# Altium PCB M1-Test-Board.PcbDoc (part 3 of 5)
Units mil, origin at the board's own origin, x right, y up, seen from the top; angles counter-clockwise.
Board outline 3977 x 5000 mil, 4 copper layers (Top, GND Layer 2, Power Layer 3, Bottom), stack 60 mil thick; 191 components, 124 nets, 579 pads, 189 vias.
Unrouted connection lines stored in the file: 80.
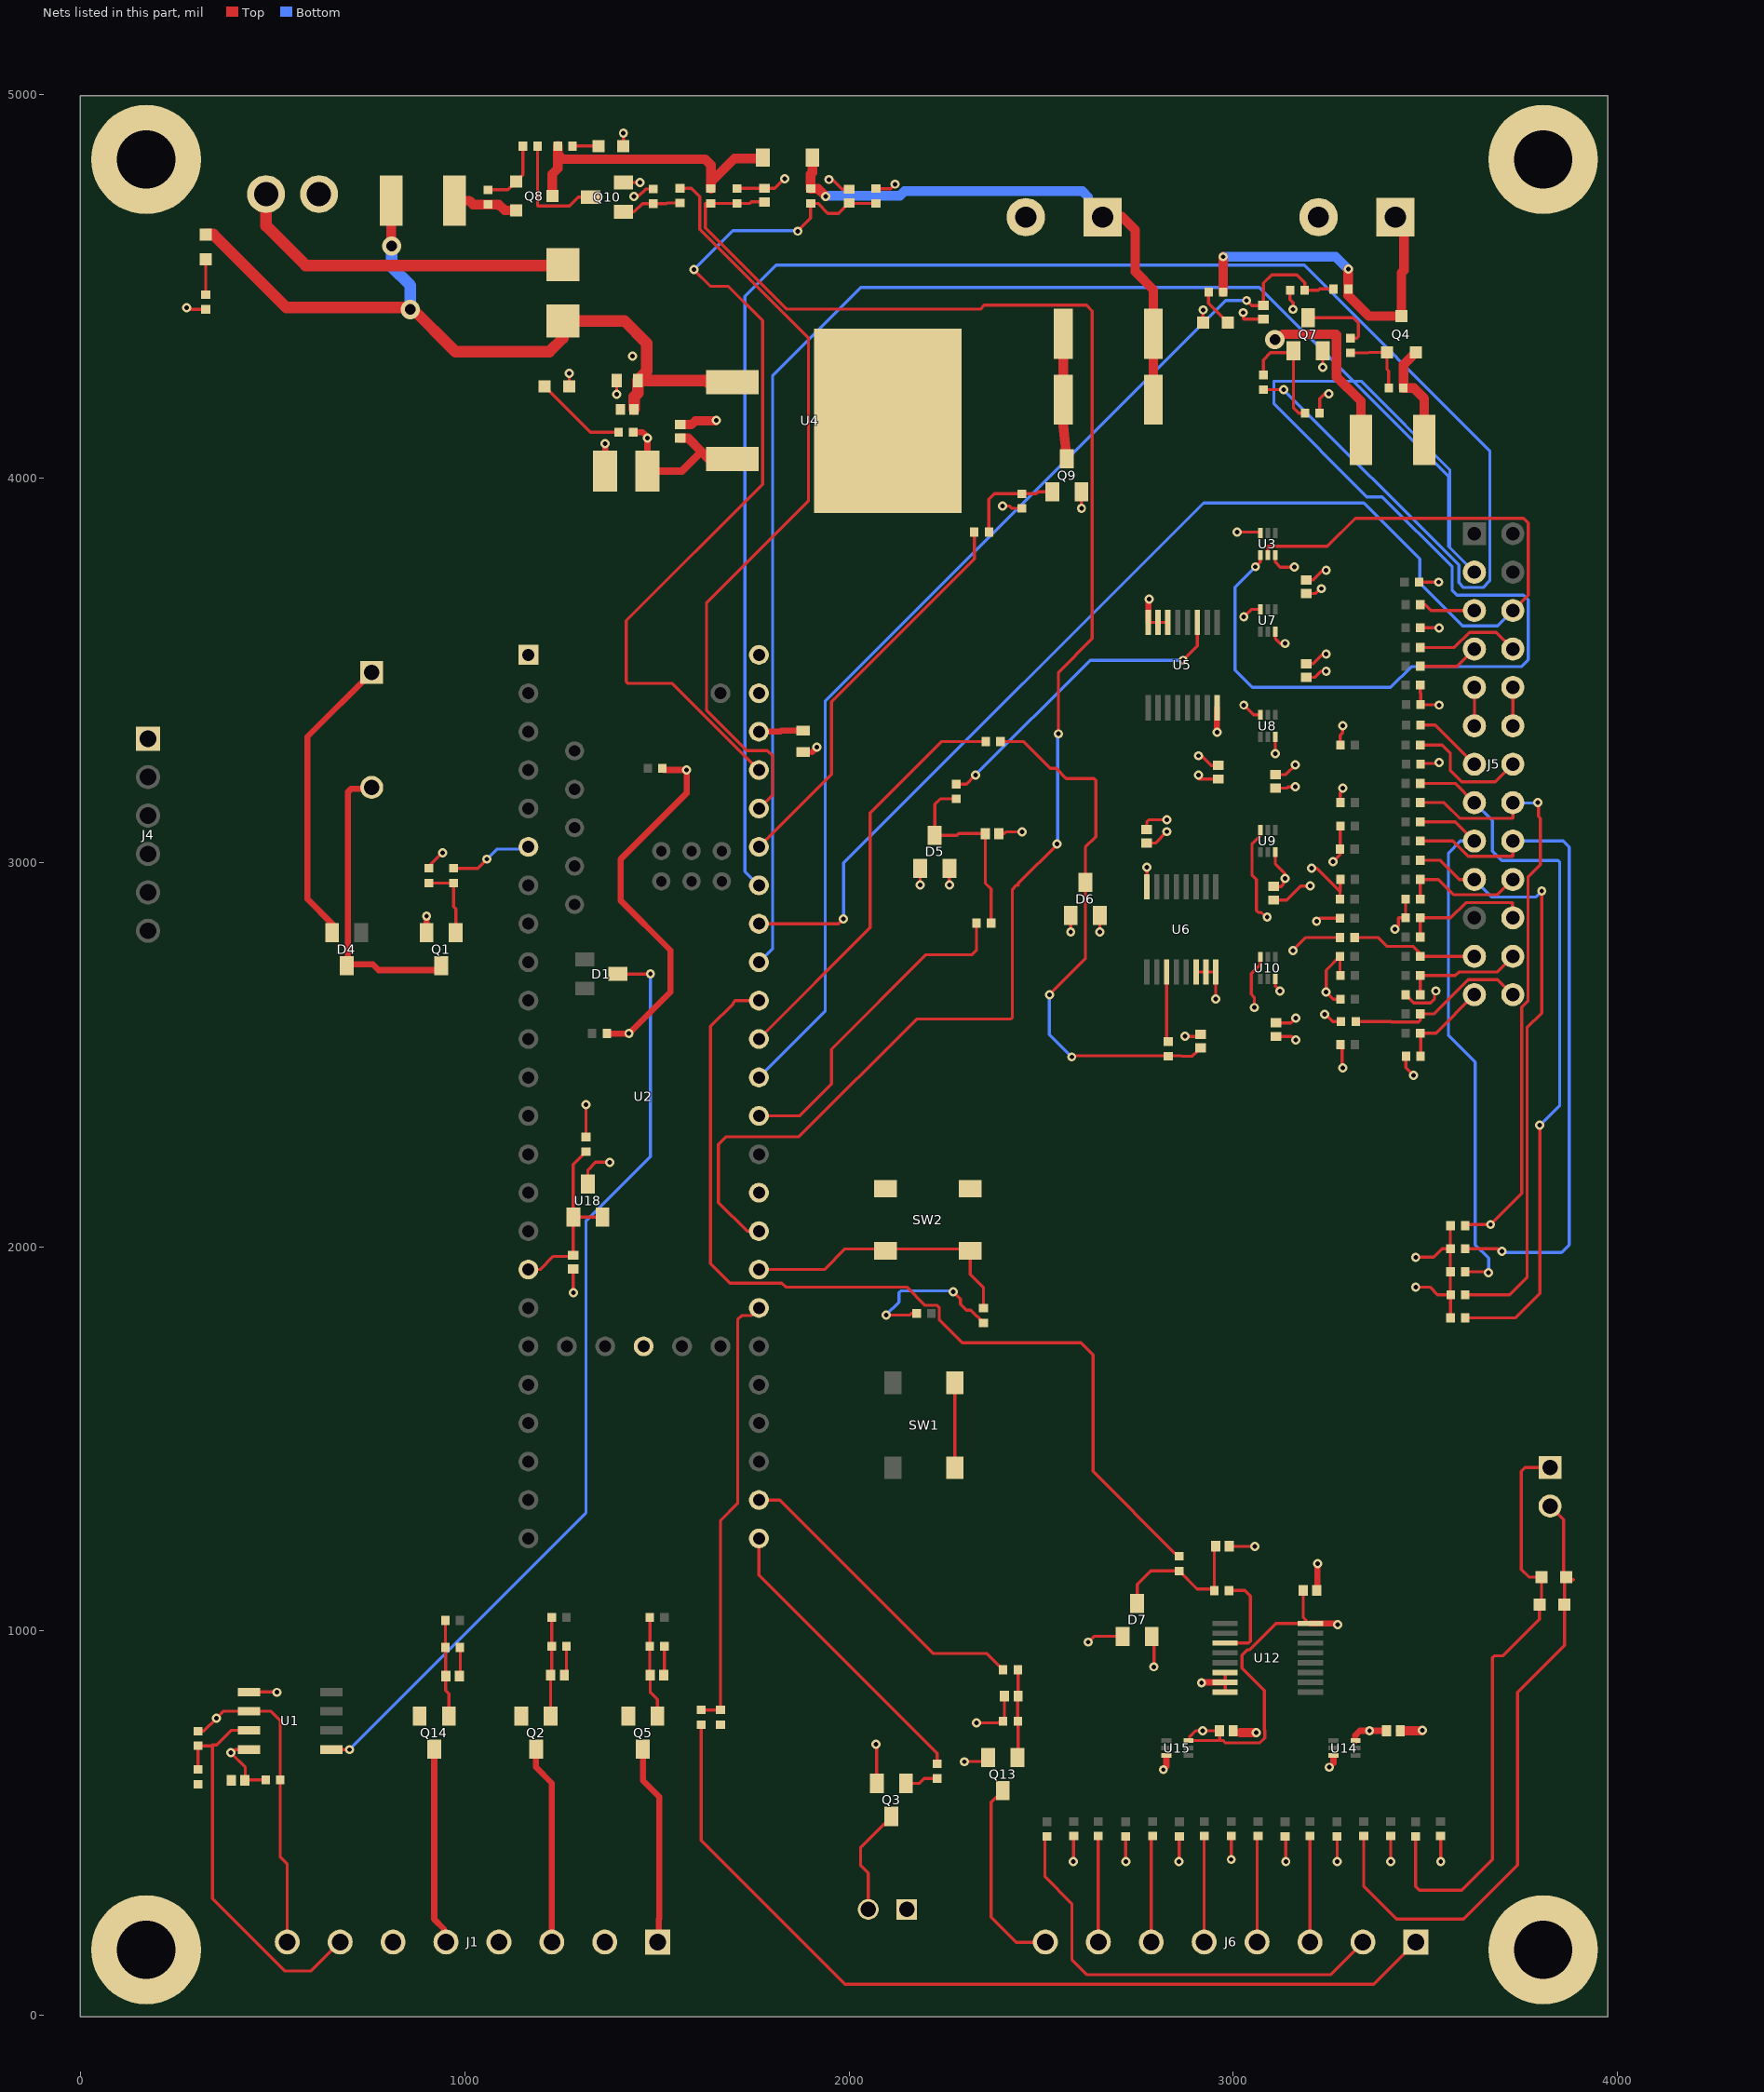
[diagram p4: the nets of this part, all layers, seen from the top]

## Part data (continued)
R2 R3 R8 R22 R23 R24 R25 R26 R27 R28 R29 R30 R31 R32 R33 R34 R35 R36 R37 R38 R39 R40 R41 R42 R43 R44 R45 R46 R47 R48 R49 R52 R60 R61 R62 R63 R64 R65 R66 R67 R70 R73 R88 R90 R92 R94 R99 R100 R102 R103 R104 R108 R117 R118 R119 R120 R121: library part Res-00002, "Thick Film 0402 10K OHM 1% 1/16W 0402", Case Code (Imperial)=0402, Case Code (Metric)=1005, LCSC Part Number=C25744, Manufacturer=Yageo, Manufacturer Part Number=RC0402FR-0710KP, Max Operating Temperature=155°C, Max Power Dissipation=63mW, Min Operating Temperature=-55°C, Power Rating=62.5mW, Resistance=10k, Resistor Type="Thick Film", Supplier Part Number 1=YAG1249CT-ND, Temperature Coefficient=150ppm/°C, Tolerance=1%, Case/Package=0402, Category="Chip SMD Resistors", ComponentLink1Description=http://www.yageo.com/NewPortal/yageodocoutput, ComponentLink1URL=http://www.yageo.com/NewPortal/yageodocoutput, Features="Moisture Resistant", Height=0.016inch, Length=0.039inch, Mount="Surface Mount", Number of Terminations=2, Packaging="Tape and Reel", Part Name=Res-00002, Pricing 1="1=0.10000, 10=0.03600, 100=0.01450, 1000=0.00", RoHS=Yes, RoHS Compliant=Yes, Stock 1=161500, Supplier 1=Digi-Key, Width=0.02inch
R4 R5 R82: library part Res-00009, "Thick Film 0402 330 Ohm 1% 1/16W ±100ppm/°C Molded SMD Paper T/R", Case Code (Imperial)=0402, Case Code (Metric)=1005, LCSC Part Number=C12246, Manufacturer=Yageo, Manufacturer Part Number=AF0402FR-07330RL, Max Operating Temperature=155°C, Max Power Dissipation=63mW, Min Operating Temperature=-55°C, Power Rating=62.5mW, Resistance=330R, Resistor Type="Thick Film", Supplier Part Number 1=13-AF0402FR-07330RLCT-ND, Temperature Coefficient=100ppm/°C, Tolerance=1%, Case/Package=0402, Category="Chip SMD Resistors", ComponentLink1Description=http://www.yageo.com/documents/recent/PYu-AF_, ComponentLink1URL=http://www.yageo.com/documents/recent/PYu-AF_, Features="Moisture Resistant,Anti-Sulfur", Height=0.015inch, Length=0.039inch, Mount="Surface Mount", Number of Terminations=2, Packaging="Tape and Reel", Part Name=Res-00009, Pricing 1="1=0.10000, 10=0.05800, 100=0.02360, 1000=0.01", Radiation Hardening=No, RoHS=Yes, RoHS Compliant=Yes, Stock 1=15948, Supplier 1=Digi-Key, Width=0.02inch
R6 R89 R101 R113: library part Res-00004, "Thick Film 0402 5.1K Ohm 1% 1/16W 0402", Case Code (Imperial)=0402, Case Code (Metric)=1005, LCSC Part Number=C25905, Manufacturer="Stackpole Electronics", Manufacturer Part Number=RMCF0402FT5K10, Max Operating Temperature=155°C, Max Power Dissipation=63mW, Min Operating Temperature=-55°C, Power Rating=62.5mW, Resistance=5.1k, Resistor Type="Thick Film", Supplier Part Number 1=RMCF0402FT5K10CT-ND, Temperature Coefficient=100ppm/°C, Tolerance=1%, Case/Package=0402, Category="Chip SMD Resistors", ComponentLink1Description=http://components.arrow.com/part/dataview/513, ComponentLink1URL=http://components.arrow.com/part/dataview/513, ComponentLink2Description=https://www.seielect.com/catalog/SEI-RMCF_RMC, ComponentLink2URL=https://www.seielect.com/catalog/SEI-RMCF_RMC, ComponentLink3Description=https://www.seielect.com/catalog/SEI-Packagin, ComponentLink3URL=https://www.seielect.com/catalog/SEI-Packagin, ComponentLink4Description=https://datasheet.ciiva.com/15193/getdatashee, ComponentLink4URL=https://datasheet.ciiva.com/15193/getdatashee, Construction=Rectangular, Contact Plating=Tin,Matte, Depth=0.5mm, Features="Automotive AEC-Q200", Height=0.016inch, Lead Free="Lead Free", Length=0.039inch, Military Standard=Not, Mount="Surface Mount", Number of Terminations=2, Packaging="Tape and Reel", Part Name=Res-00004, Pricing 1="1=0.10000, 10=0.01500, 100=0.00610, 1000=0.00", Radiation Hardening=No, RoHS=Yes, RoHS Compliant=Yes, Series=RMCF, Size Code=0402, Stock 1=131490, Supplier 1=Digi-Key, Width=0.02inch
R7 R85: library part Res-00001, "Thick Film 0402 1K Ohm 1% 1/8W 0402", Case Code (Imperial)=0402, Case Code (Metric)=1005, LCSC Part Number=C21190, Manufacturer="TE Connectivity", Manufacturer Part Number=CRGP0402F1K0, Max Operating Temperature=155°C, Max Power Dissipation=125mW, Min Operating Temperature=-55°C, Power Rating=0.125W, Resistance=1k, Resistor Type="Thick Film", Supplier Part Number 1=A130355CT-ND, Temperature Coefficient=100ppm/°C, Tolerance=1%, Case/Package=0402, Category="Chip SMD Resistors", ComponentLink1Description=https://www.te.com/commerce/DocumentDelivery/, ComponentLink1URL=https://www.te.com/commerce/DocumentDelivery/, ComponentLink4Description=none, Mount="Surface Mount", Number of Terminations=2, Packaging="Tape and Reel", Part Name=Res-00001, Pricing 1="1=0.12000, 10=0.11100, 100=0.04270, 1000=0.01", RoHS=Yes, RoHS Compliant=Yes, Stock 1=16450, Supplier 1=Digi-Key
R9 R10 R96 R105 R109 R116 R124 R125: library part Res-00003, "Thick Film 0402 100K OHM 1% 1/16W 0402", Case Code (Imperial)=0402, Case Code (Metric)=1005, LCSC Part Number=C25741, Manufacturer="Stackpole Electronics", Manufacturer Part Number=RMCF0402FT100K, Power Rating=62.5mW, Supplier Part Number 1=RMCF0402FT100KCT-ND, Case/Package=0402, Category="Chip SMD Resistors", Contact Plating=Tin,Matte, Mount="Surface Mount", Part Name=Res-00003, Pricing 1="1=0.10000, 10=0.01500, 100=0.00610, 1000=0.00", RoHS=Yes, Stock 1=13703190, Supplier 1=Digi-Key
R11 R12 R13 R14 R15 R16 R50 R51 R53 R54 R55 R56 R57 R68 R69 R71 R72: library part Res-00011, "Res Thick Film 0402 51K Ohm 1% 0.063W(1/16W) ±100ppm/C Pad SMD Automotive T/R", Case Code (Imperial)=0402, Case Code (Metric)=1005, LCSC Part Number=C25794, Manufacturer="Stackpole Electronics", Manufacturer Part Number=RMCF0402FT51K0, Max Operating Temperature=155°C, Max Power Dissipation=63mW, Min Operating Temperature=-55°C, Resistance=51kR, Resistor Type="Thick Film", Supplier Part Number 1=RMCF0402FT51K0CT-ND, Temperature Coefficient=100ppm/°C, Tolerance=1%, Case/Package=0402, Category="Chip SMD Resistors", ComponentLink1Description=http://components.arrow.com/part/dataview/535, ComponentLink1URL=http://components.arrow.com/part/dataview/535, ComponentLink2Description=https://www.seielect.com/catalog/SEI-RMCF_RMC, ComponentLink2URL=https://www.seielect.com/catalog/SEI-RMCF_RMC, ComponentLink3Description=https://www.seielect.com/Catalog/SEI-RMCF_RMC, ComponentLink3URL=https://www.seielect.com/Catalog/SEI-RMCF_RMC, ComponentLink4Description=https://www.seielect.com/catalog/SEI-Packagin, ComponentLink4URL=https://www.seielect.com/catalog/SEI-Packagin, Contact Plating=Tin,Matte, Features="Automotive AEC-Q200", Height=0.016inch, Length=0.039inch, Mount="Surface Mount", Number of Terminations=2, Packaging="Tape and Reel", Part Name=Res-00011, Power Rating=63mW, Pricing 1="1=0.10000, 10=0.01500, 100=0.00610, 1000=0.00", Radiation Hardening=No, RoHS=Yes, RoHS Compliant=Yes, Series=RMCF, Stock 1=588931, Supplier 1=Digi-Key, Width=0.02inch
R17 R21 R58 R59 R93 R106 R107 R111 R112 R114: library part Res-00008, "Thick Film 0402 2.8K Ohm 1% 0.063W ±100ppm/°C Molded SMD Paper T/R", Case Code (Imperial)=0402, Case Code (Metric)=1005, LCSC Part Number=C62741, Manufacturer="Stackpole Electronics", Manufacturer Part Number=RMCF0402FT2K80, Max Operating Temperature=155°C, Max Power Dissipation=63mW, Min Operating Temperature=-55°C, Power Rating=62.5mW, Resistance=2.8kR, Resistor Type="Thick Film", Supplier Part Number 1=RMCF0402FT2K80CT-ND, Temperature Coefficient=100ppm/°C, Tolerance=1%, Case/Package=0402, Category="Chip SMD Resistors", ComponentLink1Description=https://www.seielect.com/catalog/SEI-RMCF_RMC, ComponentLink1URL=https://www.seielect.com/catalog/SEI-RMCF_RMC, ComponentLink2Description=https://www.seielect.com/Catalog/SEI-RMCF_RMC, ComponentLink2URL=https://www.seielect.com/Catalog/SEI-RMCF_RMC, ComponentLink3Description=https://www.seielect.com/catalog/SEI-Packagin, ComponentLink3URL=https://www.seielect.com/catalog/SEI-Packagin, Contact Plating=Tin,Matte, Features="Automotive AEC-Q200", Height=0.016inch, Lead Free="Lead Free", Length=0.039inch, Mount="Surface Mount", Number of Terminations=2, Packaging="Tape and Reel", Part Name=Res-00008, Pricing 1="1=0.10000, 10=0.01500, 100=0.00610, 1000=0.00", Radiation Hardening=No, RoHS=Yes, RoHS Compliant=Yes, Series=RMCF, Stock 1=141882, Supplier 1=Digi-Key, Width=0.02inch
R18 R19 R20: library part Res-00012, "Res Thick Film 0402 8.2K Ohm 5% 0.063W ±100ppm/°C Molded SMD Paper T/R", Case Code (Imperial)=0402, Case Code (Metric)=1005, LCSC Part Number=C25924, Manufacturer="Stackpole Electronics", Manufacturer Part Number=RMCF0402JT8K20, Max Operating Temperature=155°C, Max Power Dissipation=63mW, Min Operating Temperature=-55°C, Resistance=8.2kR, Resistor Type="Thick Film", Supplier Part Number 1=738-RMCF0402JT8K20CT-ND, Temperature Coefficient=100ppm/°C, Tolerance=5%, Case/Package=0402, Category="Chip SMD Resistors", ComponentLink1Description=https://www.seielect.com/Catalog/SEI-RMCF_RMC, ComponentLink1URL=https://www.seielect.com/Catalog/SEI-RMCF_RMC, ComponentLink2Description=https://www.seielect.com/catalog/sei-rmcf_rmc, ComponentLink2URL=https://www.seielect.com/catalog/sei-rmcf_rmc, ComponentLink3Description=https://www.seielect.com/catalog/SEI-RMCF_RMC, ComponentLink3URL=https://www.seielect.com/catalog/SEI-RMCF_RMC, ComponentLink4Description=http://www.seielect.com/Catalog/Sei-RMC.pdf?s, ComponentLink4URL=http://www.seielect.com/Catalog/Sei-RMC.pdf?s, Contact Plating=Tin,Matte, Features="Automotive AEC-Q200", Height=0.016inch, Lead Free="Lead Free", Length=0.039inch, Mount="Surface Mount", Number of Terminations=2, Packaging="Tape and Reel", Part Name=Res-00012, Power Rating=63mW, Pricing 1="1=0.10000, 10=0.01200, 100=0.00470, 1000=0.00", Radiation Hardening=No, RoHS=Yes, RoHS Compliant=Yes, Series=RMCF, Size Code=0402, Stock 1=9938, Supplier 1=Digi-Key, Width=0.02inch
R97 R98: library part Res-00005, "Thick Film  220 OHM 5% 1W 2512", Case Code (Imperial)=2512, Case Code (Metric)=6432, LCSC Part Number=C38808, Manufacturer="Stackpole Electronics", Manufacturer Part Number=RMCF2512JT220R, Max Operating Temperature=155°C, Max Power Dissipation=1W, Min Operating Temperature=-55°C, Resistance=220R, Resistor Type="Thick Film", Supplier Part Number 1=RMCF2512JT220RCT-ND, Temperature Coefficient=200ppm/°C, Tolerance=5%, Case/Package=2512, Category="Chip SMD Resistors", ComponentLink1Description=https://datasheet.ciiva.com/15193/getdatashee, ComponentLink1URL=https://datasheet.ciiva.com/15193/getdatashee, Construction=Rectangular, Contact Plating=Tin,Matte, Depth=3.2mm, Features="Automotive AEC-Q200", Height=0.028inch, Lead Free="Lead Free", Length=0.248inch, Military Standard=Not, Mount="Surface Mount", Number of Terminations=2, Packaging="Tape and Reel", Part Name=Res-00005, Power Rating=1W, Pricing 1="1=0.30000, 10=0.25300, 100=0.09890, 1000=0.04", Radiation Hardening=No, RoHS=Yes, RoHS Compliant=Yes, Series=RMCF, Size Code=2512, Stock 1=85, Supplier 1=Digi-Key, Width=0.126inch
R110: library part Res-00010, "Thick Film 0402 680 Ohm 1% 0.063W(1/16W) ±100ppm/C Pad SMD Automotive T/R", Case Code (Imperial)=0402, Case Code (Metric)=1005, LCSC Part Number=C25130, Manufacturer="Stackpole Electronics", Manufacturer Part Number=RMCF0402FT680R, Max Operating Temperature=155°C, Max Power Dissipation=63mW, Min Operating Temperature=-55°C, Package Quantity=10000, Power Rating=62.5mW, Resistance=680R, Resistor Type="Thick Film", Supplier Part Number 1=RMCF0402FT680RCT-ND, Temperature Coefficient=100ppm/°C, Tolerance=1%, Case/Package=0402, Category="Chip SMD Resistors", ComponentLink1Description=http://www.seielect.com/Catalog/SEI-RMCF_RMCP, ComponentLink1URL=http://www.seielect.com/Catalog/SEI-RMCF_RMCP, ComponentLink2Description=https://www.seielect.com/catalog/SEI-RMCF_RMC, ComponentLink2URL=https://www.seielect.com/catalog/SEI-RMCF_RMC, ComponentLink3Description=https://www.seielect.com/Catalog/SEI-RMCF_RMC, ComponentLink3URL=https://www.seielect.com/Catalog/SEI-RMCF_RMC, ComponentLink4Description=https://www.seielect.com/catalog/SEI-Packagin, ComponentLink4URL=https://www.seielect.com/catalog/SEI-Packagin, Contact Plating=Tin,Matte, Features="Automotive AEC-Q200", Height=0.016inch, Length=0.039inch, Mount="Surface Mount", Number of Terminations=2, Packaging="Tape and Reel", Part Name=Res-00010, Pricing 1="1=0.10000, 10=0.01500, 100=0.00610, 1000=0.00", Radiation Hardening=No, RoHS=Yes, RoHS Compliant=Yes, Series=RMCF, Stock 1=143190, Supplier 1=Digi-Key, Width=0.02inch
SW1: library part SW-0002, "Switch Tactile N.O. SPST Round Button J-Bend", Case/Package=SMD/SMT, Color=Black, Contact Current Rating=50mA, LCSC Part Number=C221748, Manufacturer="ITT C&K", Max Operating Temperature=85°C, Max Voltage Rating (DC)=32V, Min Operating Temperature=-40°C, Operating Force=5N, Package Quantity=1, Power Rating=1W, Supplier Part Number 1=401-1784-1-ND, Actuator Length=2.6mm, Actuator Material=Nylon,Polyamide,PA66, Actuator Type=Standard, Category="Tactile Switches", ComponentLink1Description=https://datasheet.ciiva.com/29903/getdatashee, ComponentLink1URL=https://datasheet.ciiva.com/29903/getdatashee, ComponentLink2Description=https://datasheet.ciiva.com/14920/pts645-1492, ComponentLink2URL=https://datasheet.ciiva.com/14920/pts645-1492, ComponentLink3Description=https://datasheet.ciiva.com/22637/1707731-226, ComponentLink3URL=https://datasheet.ciiva.com/22637/1707731-226, Contact Material=Silver, Contact Plating=Silver, Current Rating=50mA, Depth=6.8mm, Illumination Type=Non-Illuminated,Illuminated, Lead Free="Lead Free", Length=6.2mm, Manufacturer Part Number=KSC441J70SHLFS, Max Current Rating=50mA, Mechanical Life=300000Cycles, Mount="Surface Mount", Orientation=Straight, Packaging="Tape and Reel", Part Name=SW-0002, Pricing 1="1=0.61000, 10=0.58400, 25=0.56200, 100=0.4863", REACH SVHC="No SVHC", RoHS=Yes, Series=KSC, Stock 1=60296, Supplier 1=Digi-Key, Switch Function=Off-Mom, Switch Travel=0.75mm, Termination=J-Bend, Throw Configuration=SPST, Voltage Rating (DC)=32V
SW2: library part SW-0001, "Switch Tactile N.O. SPST Round Button J-Bend", Actuator Color=Blue, Case/Package=SMD/SMT, Current Rating=50mA, LCSC Part Number=C221766, Manufacturer="ITT C&K", Manufacturer Part Number=KSC741JLFS, Max Operating Temperature=85°C, Max Voltage Rating (DC)=32V, Min Operating Temperature=-40°C, Operating Force=4N, Package Quantity=1000, Power Rating=1W, Ratings="IP67,Waterproof,Dust Tight", Supplier Part Number 1=CKN10309CT-ND, Actuator Length=1.7mm, Actuator Type=Standard, Category="Tactile Switches", ComponentLink1Description=https://datasheet.ciiva.com/16458/ksc741jlfs-, ComponentLink1URL=https://datasheet.ciiva.com/16458/ksc741jlfs-, ComponentLink2Description=https://datasheet.ciiva.com/2900/ksc-2900326., ComponentLink2URL=https://datasheet.ciiva.com/2900/ksc-2900326., ComponentLink3Description=https://datasheet.ciiva.com/2900/ksc-2900327., ComponentLink3URL=https://datasheet.ciiva.com/2900/ksc-2900327., ComponentLink4Description=https://datasheet.ciiva.com/2900/ksc-2900328., ComponentLink4URL=https://datasheet.ciiva.com/2900/ksc-2900328., ComponentLink5Description=https://datasheet.ciiva.com/22829/0900766b80a, ComponentLink5URL=https://datasheet.ciiva.com/22829/0900766b80a, ComponentLink6Description=https://datasheet.ciiva.com/16298/ksc441j70sh, ComponentLink6URL=https://datasheet.ciiva.com/16298/ksc441j70sh, ComponentLink7Description=https://datasheet.ciiva.com/18144/ksc-22jan15, ComponentLink7URL=https://datasheet.ciiva.com/18144/ksc-22jan15, ComponentLink8Description=https://datasheet.ciiva.com/2900/ksc-2900355., ComponentLink8URL=https://datasheet.ciiva.com/2900/ksc-2900355., ComponentLink9Description=https://datasheet.ciiva.com/2900/ksc-2900356., ComponentLink9URL=https://datasheet.ciiva.com/2900/ksc-2900356., ComponentLink10Description=https://datasheet.ciiva.com/2900/ksc-2900357., ComponentLink10URL=https://datasheet.ciiva.com/2900/ksc-2900357., ComponentLink11Description=https://datasheet.ciiva.com/16155/ksc-11mar10, ComponentLink11URL=https://datasheet.ciiva.com/16155/ksc-11mar10, Contact Material=Silver, Contact Plating=Silver, Depth=6.8mm, Illumination Type=Non-Illuminated, Lead Free="Lead Free", Length=6.2mm, Max Current Rating=50mA, Mechanical Life=300000Cycles, Mount="Surface Mount", Orientation=Straight, Packaging="Tape and Reel", Part Name=SW-0001, Pricing 1="1=0.59000, 10=0.56600, 25=0.54520, 100=0.4719", Radiation Hardening=No, REACH SVHC="No SVHC", RoHS=Yes, RoHS Compliant=Yes, Series=KSC, Size=6.2mm, Stock 1=157978, Supplier 1=Digi-Key, Switch Function=Off-Mom, Switch Travel=0.4mm, Termination=J-Bend, Throw Configuration=SPST, Voltage Rating (DC)=32V
U1: library part dd-0001, "IC TXRX RS485 HALF DUPLEX 8SOIC", BOM_JLCPCB Part Class="Basic Part", BOM_Manufacturer=EXAR, BOM_Manufacturer Part=SP485EEN-L/TR, Case/Package=SOIC, LCSC Part Number=C6855, Manufacturer=Exar, Max Operating Temperature=85°C, Max Power Dissipation=550mW, Max Supply Voltage=5.25V, Min Operating Temperature=-40°C, Min Supply Voltage=4.75V, Nominal Supply Current=900uA, Operating Supply Voltage=5V, Package Display=No, Package Quantity=2500, BOM_Supplier=LCSC, BOM_Supplier Part=C6855, Category="Interface ICs", ComponentLink1Description=https://datasheet.ciiva.com/16991/0900766b80d, ComponentLink1URL=https://datasheet.ciiva.com/16991/0900766b80d, ComponentLink2Description=https://datasheet.ciiva.com/6633/sp481e-485e-, ComponentLink2URL=https://datasheet.ciiva.com/6633/sp481e-485e-, ComponentLink3Description=https://datasheet.ciiva.com/6633/sp481e-485e-, ComponentLink3URL=https://datasheet.ciiva.com/6633/sp481e-485e-, ComponentLink4Description=https://datasheet.ciiva.com/6633/sp481e-485e-, ComponentLink4URL=https://datasheet.ciiva.com/6633/sp481e-485e-, ComponentLink5Description=https://datasheet.ciiva.com/16378/sp485een-l-, ComponentLink5URL=https://datasheet.ciiva.com/16378/sp485een-l-, Data Rate=10Mbps, Height=1.65mm, Interface=RS-422,RS-485, Lead Free="Lead Free", Length=4.9mm, Logic Function=Transceiver, Manufacturer Part Number=SP485EEN-L/TR, Mount="Surface Mount", Number of Drivers=1, Number of Pins=8, Number of Receivers=1, Number of Transceivers=1, Number of Transmitters=1, Packaging="Tape and Reel", Part Name=dd-0001, Radiation Hardening=No, RoHS=Yes, RoHS Compliant=Yes, Simplex/Duplex="Half Duplex", spicePre=U, spiceSymbolName=SP485EEN-L/TR, Supplier 1=Digi-Key, Supplier Part Number 1=SP485EEN-L/TR-ND, Width=3.9mm
U2: library part Mod-0004, "Teensy 4.1 Development Board", Manufacturer=SparkFun, Manufacturer Part Number=DEV-16771, Supplier Part Number 1=1568-DEV-16771-ND, Category="Embedded Processors and Controllers", Part Name=Mod-0004, RoHS=No, Supplier 1=Digi-Key
U3 U7 U8 U9 U10 U14 U15: library part Diode-0012, "TVS DIODE 5.5VWM SOT6", Breakdown Voltage=11V, Capacitance=1.5pF, Case/Package=SOT, Clamping Voltage=105.5V, LCSC Part Number=C527516, Leakage Current=1nA, Manufacturer="Texas Instruments", Max Operating Temperature=85°C, Max Power Dissipation=100W, Min Operating Temperature=-40°C, Operating Supply Voltage=5.5V, Package Quantity=1, Peak Pulse Current=5.5A, Power Line Protection=Yes, Supplier Part Number 1=296-21887-1-ND, Category="ESD and Circuit Protection ICs", ComponentLink1Description=https://datasheet.ciiva.com/5839/1535398-5839, ComponentLink1URL=https://datasheet.ciiva.com/5839/1535398-5839, ComponentLink2Description=https://datasheet.ciiva.com/22696/1831342-226, ComponentLink2URL=https://datasheet.ciiva.com/22696/1831342-226, ComponentLink3Description=https://datasheet.ciiva.com/1219/tpd4e001-121, ComponentLink3URL=https://datasheet.ciiva.com/1219/tpd4e001-121, ComponentLink4Description=https://datasheet.ciiva.com/15134/getdatashee, ComponentLink4URL=https://datasheet.ciiva.com/15134/getdatashee, ComponentLink5Description=https://datasheet.ciiva.com/7659/1853592-7659, ComponentLink5URL=https://datasheet.ciiva.com/7659/1853592-7659, ComponentLink6Description=https://datasheet.ciiva.com/338/tpd4e001-3380, ComponentLink6URL=https://datasheet.ciiva.com/338/tpd4e001-3380, ComponentLink7Description=https://datasheet.ciiva.com/338/tpd4e001-3380, ComponentLink7URL=https://datasheet.ciiva.com/338/tpd4e001-3380, ComponentLink8Description=https://datasheet.ciiva.com/338/tpd4e001-3380, ComponentLink8URL=https://datasheet.ciiva.com/338/tpd4e001-3380, ComponentLink9Description=https://datasheet.ciiva.com/14423/tpd4e001-14, ComponentLink9URL=https://datasheet.ciiva.com/14423/tpd4e001-14, Contact Plating=Gold, Depth=1.2mm, Direction=Unidirectional, Height=0.55mm, Interface=LVDS,USB,Ethernet, Lead Free="Lead Free", Length=1.6mm, Manufacturer Part Number=TPD4E001DRLR, Max Breakdown Voltage=11V, Min Breakdown Voltage=11V, Mount="Surface Mount", Number of Bidirectional Channels=4, Number of Channels=4, Number of Pins=6, Packaging="Tape and Reel", Part Name=Diode-0012, Peak Pulse Power=100W, Polarity=Unidirectional, Pricing 1="1=0.66000, 10=0.58100, 100=0.44520, 500=0.351", Radiation Hardening=No, REACH SVHC="No SVHC", Reverse Standoff Voltage=5.5V, RoHS=Yes, RoHS Compliant=Yes, Series=-, Stock 1=42388, Supplier 1=Digi-Key, Termination=SMD/SMT, Weight=9.9E-05oz, Width=1.2mm, Working Voltage=5.5V
U4: library part LDO-0003, "IC REG LDO 5V 1.5A D2PAK", Case/Package=TO-263, Dropout Voltage=2V, LCSC Part Number=C15077, Manufacturer=STMicroelectronics, Max Input Voltage=35V, Max Operating Temperature=125°C, Max Output Current=1.5A, Min Input Voltage=10V, Min Operating Temperature=0°C, Min Output Voltage=4.8V, Nominal Output Voltage=5V, Package Quantity=1000, Power Supply Rejection Ratio (PSRR)=62dB, Quiescent Current=8mA, Supplier Part Number 1=497-1171-2-ND, Category="Voltage Regulators - Linear", Contact Plating=Tin,Matte, Height=4.6mm, Lead Free="Lead Free", Length=10.4mm, Manufacturer 1=STMicroelectronics, Manufacturer Part Number=L7805CD2T-TR, Manufacturer Part Number 1=L7805CD2T-TR, Mount="Surface Mount", Number of Outputs=1, Number of Pins=3, Number of Regulators=1, Output Current=1.5A, Output Type=Fixed, Output Voltage=5V, Packaging="Tape and Reel", Part Name=LDO-0003, Polarity=Positive, Pricing 1="1=1.02000, 10=0.91100, 25=0.86480, 100=0.7104", Radiation Hardening=No, REACH SVHC="No SVHC", RoHS=Yes, RoHS Compliant=Yes, Series=-, Stock 1=30, Supplier 1=Digi-Key, Supplier 2=LCSC, Supplier 3=Newark, Supplier Part Number 2=C15077, Supplier Part Number 3=95M4314, Weight=7.1E-05oz, Width=9.35mm
U5 U6 U12: library part AIC-0001, "5-V, 8: 1, 1-channel analog mutliplexer 16-TS", Case/Package=TSSOP, Dual Supply Voltage=3V, Generic Part Number=CD74HC4051, High Level Output Current=25mA, LCSC Part Number=C352826, Manufacturer="Texas Instruments", Max Dual Supply Voltage=5V, Max Operating Temperature=125°C, Max Supply Voltage=6V, Min Dual Supply Voltage=1V, Min Operating Temperature=-55°C, Min Supply Voltage=2V, Nominal Supply Current=16uA, On-State Resistance=130R, Operating Temperature Range(C)="-55 to 125", Package Quantity=1, Rating=Catalog, Supplier Part Number 1=29AH3620, Bandwidth=180MHz, Bandwidth(Max)(MHz)=180, Category="Decoders and Multiplexers", Code_JEDEC="MS-012 variation AC", ComponentLink1Description=https://datasheet.ciiva.com/15127/getdatashee, ComponentLink1URL=https://datasheet.ciiva.com/15127/getdatashee, ComponentLink2Description=https://datasheet.ciiva.com/27092/1326571-270, ComponentLink2URL=https://datasheet.ciiva.com/27092/1326571-270, ComponentLink3Description=https://datasheet.ciiva.com/1514/1789854-1514, ComponentLink3URL=https://datasheet.ciiva.com/1514/1789854-1514, ComponentLink4Description=https://datasheet.ciiva.com/1171/1633734-1171, ComponentLink4URL=https://datasheet.ciiva.com/1171/1633734-1171, ComponentLink5Description=https://datasheet.ciiva.com/1171/1633734-1171, ComponentLink5URL=https://datasheet.ciiva.com/1171/1633734-1171, ComponentLink6Description=https://datasheet.ciiva.com/2978/cd74hct4053-, ComponentLink6URL=https://datasheet.ciiva.com/2978/cd74hct4053-, ComponentLink7Description=https://datasheet.ciiva.com/46391/1840262-463, ComponentLink7URL=https://datasheet.ciiva.com/46391/1840262-463, Configuration="1 X 1：8 MUX", Contact Plating=Gold, Crosstalk=Yes, DatasheetVersion=SCHS122J, Height=1.15mm, Lead Free="Lead Free", Length=5mm, Logic Function=Multiplexer,Demultiplexer, Low Level Output Current=25mA, Manufacturer Part Number=CD74HC4051PWR, Max Output Current=25mA, Mount="Surface Mount", Number of Bits=8, Number of Channels=1, Number of Circuits=1, Number of Inputs=8, Number of Outputs=1, Number of Pins=16, Number of Switches=1, PackageReference=D0016A, PackageVersion=http://www.ti.com/lit/ml/mpds178g/mpds178g.pdf, Packaging="Tape and Reel", Part Name=AIC-0001, Polarity=Non-Inverting, Pricing 1="1=0.33420, 10=0.26780, 30=0.23940, 100=0.2039", Propagation Delay=60ns, Radiation Hardening=No, REACH SVHC="No SVHC", RoHS=Yes, RoHS Compliant=Yes, Ron(Max)(Ohms)=130, Ron(Typ)(Ohms)=45, Series=74HC, Stock 1=12645, Supplier 1=Newark, Supply Current=16uA, Supply Type=Single,Dual, Termination=SMD/SMT, Turn-Off Delay Time=225ns, Turn-On Delay Time=225ns, VCC(Max)(V)=6, VCC(Min)(V)=2, Weight=0.002183oz, Width=4.4mm
U18: library part AIC-0002, "V-Ref Adjustable 2.5V to 36V 100mA 3-Pin SOT-", Case/Package=SOT-23-3, Cathode Current=60uA, LCSC Part Number=C3113, Manufacturer="ON Semiconductor", Max Input Voltage=2.525V, Max Operating Temperature=125°C, Max Output Current=100mA, Max Output Voltage=36V, Min Input Voltage=2.475V, Min Operating Temperature=-40°C, Min Output Voltage=2.5V, Package Quantity=3000, PartNumber=TL431ACLP, Rating=Catalog, Supplier Part Number 1=NCP431AVSNT1GOSCT-ND, Temp Coeff(Max)(ppm/ degree C)=92, Temp Coeff(Typ)(ppm/ degree C)=34, Temperature Coefficient=50ppm/°C, Tolerance=1%, Category="Voltage References", Code_JEDEC=TO-226, ComponentLink1Description=https://datasheet.ciiva.com/8132/ncp431-d-813, ComponentLink1URL=https://datasheet.ciiva.com/8132/ncp431-d-813, ComponentLink2Description=https://datasheet.ciiva.com/30476/0900766b812, ComponentLink2URL=https://datasheet.ciiva.com/30476/0900766b812, ComponentLink3Description=https://datasheet.ciiva.com/49020/70300496-49, ComponentLink3URL=https://datasheet.ciiva.com/49020/70300496-49, DatasheetVersion=SLVS543M, Eco-Plan="Pb-Free (RoHS)", Halogen Free="Halogen Free", Height=1.01mm, Initial Accuracy @ 25/deg C(%)=1, Iout/Iz(Max)(mA)=100, Lead Free="Lead Free", Length=3.04mm, Manufacturer Part Number=NCP431AVSNT1G, Min Iz for Regulation(uA)=600, Mounting Technology="Through Hole", Number of Pins=3, Output Current=100mA, Output Type=Adjustable, Output Voltage=36V, PackageDescription="Plastic Cylindrical Package, Formed Lead Option (TO-92)", PackageReference=LP0003A, PackageVersion=4040001-2/C, Packaging="Tape and Reel", Part Name=AIC-0002, Pricing 1="1=0.44000, 10=0.35700, 25=0.32640, 100=0.2429", Radiation Hardening=No, REACH SVHC="No SVHC", Reference Type=Shunt,Adjustable,Programmable, Reference Voltage=2.5V, RoHS=Yes, Series=-, Stock 1=4510, SubFamily="Shunt Voltage Reference", Supplier 1=Digi-Key, VO Adj(Max)(V)=36, VO Adj(Min)(V)=2.495, Width=1.4mm

## Via types
v1: diameter 24, hole 12, Top to Bottom, 186 vias
v2: diameter 50, hole 28, Top to Bottom, 3 vias

## Nets (pads, with @x,y where several pads share a name; then routed paths per layer and width w, separated by ;. In a path a pad name is that pad's centre, name@x,y a point inside that pad or via, vN(x,y) a via of type N, cw(c..) or ccw(c..) an arc to the next point about the centre after c; other vN are vias at no path point)
+3.3V: D5.2 D6.2 D7.2 F3.2 R2.2 R6.2 R73.2 R117.2 | length 1603.9
  Top w8: F3.2@1880,3287.44 1903.22,3287.44 ; v1(2096.4,1822.31) 2159.03,1822.31 2162.88,1826.16 R2.2@2175.91,1826.16 ; v1(2261,2942) D5.2@2261,2985 ; v1(2271.4,1882.31) 2289.98,1863.73 2289.98,1850.52 2305.5,1835 2316.9,1835 R73.2@2350,1801.9 ; v1(2653,2819) D6.2@2653,2862 ; D7.2@2788,985.77 2793.76,980 v1(2793.76,906.57)
  Top w16: R6.2@1369.09,2555 v1(1427,2555) 1535,2663 1535,2771.38 1405,2901.38 1405,3008.19 1577,3180.19 v1(1577,3241) 1518.09,3241 R117.2@1514.09,3245 ; 1903.22,3287.44 v1(1915.72,3299.94)
  Bottom w8: v1(2096.4,1822.31) 2130,1855.92 2130,1880.31 2134.69,1885 2268.71,1885 v1(2271.4,1882.31)
+5V: BUZ1.1 C1.1 C4.2 C6.2 C8.2 C9.2 C10.2 C11.2 C12.2 C15.2 C18.2 C19.2 C27.1 C28.2 D4.2 R4.2 R11.2 R12.2 R13.1 R40.1 R42.2 R43.2 R44.1 R46.1 R48.1 R68.1 R69.1 R82.1 R110.1 U1.8 U2.VIN U3.6 U4.3 U5.16 U6.16 U7.6 U8.6 U9.6 U10.6 U12.16 U14.6 U15.6 | length 4164
  Top w8: v1(390,682.61) v1@391.95,680.65 ; U1.8@437.75,691 402.3,691 v1@391.95,680.65 ; R4.2@480.9,612.21 428.2,612.21 428.2,644.41 v1@391.95,680.65 ; R82.1@1315,2285.47 v1(1315,2370) ; C6.2@2775,3050.6 2797.29,3050.6 v1(2827.19,3080.5) ; U6.16@2775.43,2937 v1(2775.43,2988) ; U15.6@2883.94,714.68 2963.29,714.69 ; 2886.76,720.79 2886.76,725.36 2901.41,740 C19.2@2964.6,740 2964.6,716 2963.29,714.69 ; v1(2909.38,3278) 2917.93,3278 2943.23,3252.7 C8.2@2961.57,3252.7 ; U10.6@3109.69,2696.85 3109.68,2678.36 v1(3122.18,2665.86) ; U9.6@3109.69,3027.06 3109.68,2996.07 3134.68,2971.07 v1(3134.68,2958.57) 3134.68,2954.24 3130,2949.56 3130,2942.39 3125.31,2937.7 C11.2@3105,2937.7 C11.2@3113,2945.7 ; v1(3109.68,3283.57) U8.6@3109.69,3327.06 ; U7.6@3109.69,3601.06 3109.68,3582.57 3122.18,3570.07 v1(3134.68,3570.07) ; U3.6@3109.69,3800 3109.68,3781.51 3122.18,3769.01 v1(3159.68,3769.01) ; C9.2@3110,3229 3136.89,3229 v1(3162.19,3254.3) ; C12.2@3111,2582.7 3150.39,2582.7 v1(3163.19,2595.5) ; v1(3155.5,2771) 3189.5,2805 R43.2@3278,2805 ; C15.2@3182.3,1105 3182.3,1034.55 3190,1026.85 ; C10.2@3190,3517.7 3208.33,3517.7 3233.63,3543 v1(3242.19,3543) ; C4.2@3190,3735.89 3208.33,3735.89 3233.63,3761.19 v1(3242.19,3761.19) ; U12.16@3201,1019.57 3111.57,1019.57 3043,951 3037.5,951 3023,936.5 3023,903 3081,845 3081,742 3082,741 3082,721 3069.5,708.5 2979.19,708.5 2973,714.69 2963.29,714.69 ; v1@3240,2605 3259,2586 R48.1@3280.83,2586 ; v1@3269.06,1019.57 v1@3276.06,1012.57 ; v1(3421,2827) 3430,2836 3430,2855 3431,2856 R44.1@3448.91,2856 R40.1@3448.91,2904.98 ; R46.1@3448.91,2656 3470.22,2634.69 3513.78,2634.69 3524.09,2645 3524.09,2661.09 v1@3528,2665 ; R42.2@3449.81,2496 3449.81,2465.69 v1(3469.5,2446) ; v1(3475,1895) 3512.05,1895 3532.05,1875 R13.1@3566,1875 ; v1(3475,1972.82) 3521.81,1972.82 3544,1995 R11.2@3565.91,1995 ; R13.1@3565,1875 3565,1930 3565,1986.14 R11.2@3565,1989.09 ; R11.2@3565,1990 3565,1995 R12.2@3565,2055 ; R69.1@3565.91,1815 R13.1@3565.91,1874.91
  Top w16: D4.2@655,2840 590,2905 590,3327.73 BUZ1.1@757.27,3495 ; R110.1@1438,4120 1462.5,4120 1473.02,4109.48 1473.02,4109.14 1475,4107.16 v1(1475,4105) 1475,4019.12 C27.1@1475.12,4019 ; v1(2957.95,3339.5) U5.16@2957.95,3403 ; U12.16@3201,1019.57 v1@3269.06,1019.57 ; U14.6@3318.94,714.68 3317.75,715.88 3317.75,728.1 3329.64,740 3339.64,740 C18.2@3399.6,740
  Top w20: C27.1@1475.12,4019 1565,4019 1615.79,4069.79
  Top w24: C28.2@1560,4104.6 1580.97,4104.6 1615.79,4069.79 U4.3@1635.57,4050
  other v1: 2920.94,740.36 3355,740.36 3272.19,1016 3238.37,2604.54 3528,2666
+12V: C25.1 C26.2 D10.2 DS12.1 F1.1 F2.1 U4.1 | length 2498.8
  Top w25: F2.1@807.5,4723.07 808.23,4722.33 808.23,4605.23 v2(808.97,4604.5) ; v2(3108.5,4361.5) 3115.26,4361.5 3128.76,4375 3268,4375 3269,4374 3269,4264.5 3332.5,4201 F1.1@3332.5,4100
  Top w30: DS12.1@325,4634.96 345.04,4634.96 535,4445 860,4445 975,4330 1220,4330 1255,4365 D10.2@1255,4410 1415,4410 1473.02,4351.98 1473.02,4278.54 1450.51,4256.02 C25.1@1450.51,4255 ; C26.2@1440.26,4180 1440.26,4212 1450.51,4222.25 C25.1@1450.51,4255 ; U4.1@1632.57,4250 1627.57,4255 C25.1@1450.51,4255
  Bottom w30: v2(808.97,4604.5) 808.97,4551.03 857.92,4502.08 v2(857.92,4439.5)
BootTarget: R73.1 SW2.3 SW2.4 U2.40 | length 726
  Top w8: U2.40@1765.2,1940.63 1935.63,1940.63 1989.29,1994.29 SW2.3@2305.5,1994.29 ; SW2.3@2315.5,1989.29 2315.5,1928 2350,1893.5 R73.1@2350,1840.09
BuzzerEn: R7.1 U2.4 | length 218.3
  Top w8: R7.1@970,2984.96 1032.96,2984.96 v1(1057,3009)
  Bottom w8: v1(1057,3009) 1083,3035 1159.57,3035 U2.4@1165.2,3040.63
GND: C1.2 C2.2 C3.2 C4.1 C5.2 C6.1 C7.2 C8.1 C9.1 C10.1 C11.1 C12.1 C14.2 C15.1 C18.1 C19.1 C20.2 C22.2 C23.2 C24.2 C25.2 C26.1 C27.2 C28.1 C30.2 C31.2 D5.1 D6.1 D7.1 DS8.2 DS9.2 DS11.2 J1.2 J1.4 J1.6 J4.1 J9.1 J10.2 J11.2 J12.1 MTG1.1 MTG2.1 MTG3.1 MTG4.1 Q1.2 Q2.2 Q3.2 Q5.2 Q7.2 Q9.2 Q10.2 Q13.2 Q14.2 R5.2 R9.2 R10.2 R14.1 R15.1 R16.1 R17.1 R18.1 R19.1 R20.1 R21.1 R38.2 R39.2 R41.1 R45.1 R47.1 R49.1 R50.1 R51.1 R52.1 R53.1 R54.1 R55.1 R56.1 R57.1 R58.1 R59.1 R71.1 R93.2 R96.2 R105.2 R106.2 R107.2 R109.2 R113.2 R116.2 R124.2 R125.2 SW1.1 SW1.2 SW2.1 SW2.2 U1.5 U2.GND1 U2.GND2 U2.GND3 U2.GND4 U3.3 U4.4 U5.6 U5.7 U5.8 U6.6 U6.7 U6.8 U7.3 U8.3 U9.3 U10.3 U12.6 U12.7 U12.8 U14.3 U15.3 U18.3 | length 5592.7
  Top w8: v1(275,4444) 275,4441 276,4440 R113.2@325,4440 ; U1.5@437.75,841 509.09,841 v1(510,840.09) ; R116.2@905.91,2984.96 905.91,2990.91 v1@940,3025 ; C31.2@987.7,882 R125.2@987.7,957 ; C2.2@1258.7,885 1264.09,890.39 R9.2@1264.09,960 ; DS11.2@1271.57,4240 v1(1271.57,4273.75) ; v1(1282,1880) C20.2@1282,1942.3 ; U18.3@1320,2163 1320,2200 1340,2220 v1(1377,2220) ; v1(1395,4219.28) C25.2@1395,4255 ; DS9.2@1412.48,4865 v1(1412.48,4898.75) ; Q10.2@1413,4770.13 v1(1456,4770.13) ; v1(1440,4734.09) 1451.66,4734.09 1470.76,4753.19 R109.2@1490,4753.19 ; C3.2@1517.7,885 1519.09,886.39 R10.2@1519.09,960 ; R106.2@1708,4754.09 1708,4755 C23.2@1780,4755 1806.89,4755 v1(1832.19,4780.3) ; v1(1947.81,4778) 1956.37,4778 1981.67,4752.7 C24.2@2000,4752.7 ; R107.2@2070,4754.09 2108.59,4754.09 2120,4765.5 v1(2120,4765.91) ; Q3.2@2072,603 v1@2072,703.67 ; v1(2185,2942) D5.1@2185,2985 ; SW1.2@2275,1422.42 SW1.1@2275,1643.42 ; v1@2300,660 2352.07,660 Q13.2@2362,669.93 ; v1(2331.97,760.81) 2388.69,760.81 2392.88,765 R124.2@2400.91,765 2404.6,768.69 C30.2@2404.6,830 ; C5.2@2390,3075 2404,3075 2409,3080 v1(2450,3080) ; v1(2400,3928) 2418.11,3928 2424.3,3921.81 R105.2@2450,3921.81 ; v1(2577,2819) D6.1@2577,2862 ; v1(2584.1,400) 2584.1,465 R52.1@2585,465.91 ; v1(2605,3922) Q9.2@2605,3965 ; v1(2622.91,970.81) 2637.87,985.77 D7.1@2712,985.77 ; R53.1@2720,465 2720,400.91 v1(2720.91,400) ; C6.1@2775,3086 2775,3105.38 2780.92,3111.3 v1(2827.19,3111.3) ; U5.8@2779.87,3626.05 U5.8@2778.82,3625 U5.7@2804.41,3625 U5.6@2830,3625 ; v1@2779.87,3684.95 v1(2780.92,3686) ; v1@2819.09,640 v1@2826.06,646.97 ; v1(2859.1,400) 2859.1,464.1 R54.1@2860,465 ; v1(2874.28,2547.56) C7.2@2910,2547.56 ; U6.6@2903.39,2715 U6.7@2928.98,2715 2949.57,2715 2954.57,2710 v1(2954.57,2645) ; v1(2909.38,3227.5) 2909.38,3218.92 2911,3217.3 C8.1@2961.57,3217.3 ; v1(2917.48,865) v1@2918.5,866.02 ; DS8.2@2921.5,4405 v1(2921.5,4438.75) ; U12.8@2979,840.43 U12.7@2979,866.02 U12.6@2979,891.61 ; v1(2995,405) R55.1@2995,465.91 ; C19.1@3000,740 3014,740 3019,735 ; 3002.56,1220 v1@3060,1220 ; v1(3010,3860) 3068.21,3860 U3.3@3070.31,3857.87 ; v1(3026.31,4431.5) 3026.31,4416 3027.71,4414.6 C22.2@3078.5,4414.6 ; v1(3027.71,3410) 3052.78,3384.94 U8.3@3070.31,3384.94 ; v1(3027.71,3640) 3046.65,3658.94 U7.3@3070.31,3658.94 ; v1(3055,2622.5) 3055,2648.95 3047,2656.95 3047,2710.64 3070.31,2733.95 U10.3@3070.31,2754.73 ; U9.3@3070.31,3084.94 3070.31,3069.5 3048.81,3048 3048.81,2967.3 3060.5,2955.62 3060.5,2874.92 3065.19,2870.23 3073.17,2870.23 3084.91,2858.5 v1(3088.39,2858.5) ; C11.1@3105,2902.3 3139.13,2902.3 3175.83,2939 v1(3200.19,2939) ; C9.1@3110,3193.6 3139.28,3193.6 3142.68,3197 v1(3162.19,3197) ; C12.1@3111,2547.3 3152.19,2547.3 3160.99,2538.5 v1(3163.19,2538.5) ; R56.1@3135,465 3136.97,463.03 v1(3136.97,400) ; R93.2@3148.12,4490 3148.12,4465.15 3156,4457.27 v1(3156,4440) ; C10.1@3190,3482.3 3213.13,3482.3 3228.83,3498 v1(3242.19,3498) ; C4.1@3190,3700.49 3214.73,3700.49 3227.24,3713 v1(3229.69,3713) ; v1(3204.5,2985.47) 3217,2985.47 3278.24,2924.24 ; v1@3214.73,2845 3224.73,2855 R47.1@3278,2855 ; R96.2@3225,4170 3225,4207.5 3237.5,4220 v1(3248.91,4220) ; v1(3233,4289) Q7.2@3233,4332 ; v1(3250,645) 3261.06,656.06 ; v1(3260,3002) 3278.91,3020.91 3278.91,3065.91 ; R57.1@3270,465 3270.91,464.09 v1(3270.91,400) ; R50.1@3278,3034.79 3278,3065 3278.91,3065.91 ; R39.2@3278.91,2526 3283.32,2521.59 3283.32,2466.88 v1(3285,2465.19) ; R41.1@3278.91,2644.19 3260.81,2644.19 v1(3242,2663) 3242,2720 R38.2@3278,2756 3278,2706.91 R45.1@3278.91,2706 ; R14.1@3278.91,2956 3278.91,2924.91 3278.24,2924.24 ; R15.1@3278.91,3095 3278.91,3065.91 ; R51.1@3278.91,3156 3278.91,3181.75 3285,3187.84 v1(3285,3193.5) ; R21.1@3278.91,3306 3278.91,3331.75 3285,3337.84 v1(3285,3356) ; v1(3410,400) R58.1@3410,465.91 ; R19.1@3484.09,3730 v1(3535,3730) ; R18.1@3487.09,3462.02 3487.09,3441 3488,3440.09 R17.1@3488,3411 3488.5,3410.5 3535.5,3410.5 v1(3536,3410) ; R20.1@3487.09,3611 v1@3532,3611 ; R16.1@3488,3256 3490,3258 3534,3258 v1(3536,3260) ; v1@3491.5,740 v1(3492.29,740.79) ; R59.1@3540,465.91 3540.41,465.5 v1(3540.41,400) ; 3278.24,2924.24 3278,2924 R49.1@3278,2904.98 3278.24,2924.24
  Top w16: Q1.2@900,2817.42 v1(900,2860.42) ; C27.2@1365.12,4019 v1(1365.12,4090.15) ; U5.8@2779.87,3626.05 v1@2779.87,3684.95 ; v1@2826.06,646.97 U15.3@2826.06,675.32 ; v1@2918.5,866.02 U12.7@2979,866.02 ; C15.1@3217.7,1105 3218.85,1106.15 3218.85,1173.85 v1(3220,1175) ; 3261.06,656.06 U14.3@3261.06,675.32
  Top w24: C28.1@1560,4140 1589.5,4140 1599.5,4150 v1@1652.36,4150 ; 3019,735 v1(3060,735) ; C18.1@3435,740 v1@3491.5,740
  other v1: 2818.19,638.9 2300,659.5 2070,704.48 3055.87,1220.28 3216.93,2847.07 941.93,3025.03 3536,3610.7 1654.31,4151 1436,4318.19
M1Boot1: R70.1 U2.34 | length 818.8
  Top w8: U2.34@1765.2,1340.63 1819.37,1340.63 2218.73,941.27 2358.25,941.27 R70.1@2400.91,898.61
NetBUZ1_2: BUZ1.2 D4.3 Q1.3 | length 787.5
  Top w16: D4.3@692,2731.42 695.58,2735 760,2735 775,2720 928,2720 938,2730 Q1.3@938,2731.42 ; 695,2757.75 695,2740 695,3182.92 704.37,3192.29 753.78,3192.29 BUZ1.2@757.27,3195.79
NetC2_1: C2.1 Q2.1 R3.2 R9.1 | length 258.2
  Top w8: Q2.1@1223,778 1223,884.7 C2.1@1223.3,885 1225.91,887.61 R9.1@1225.91,960 R3.2@1225.91,1035
NetC3_1: C3.1 Q5.1 R8.2 R10.1 | length 265.7
  Top w8: R8.2@1481.91,1035 1481.91,961 R10.1@1480.91,960 1480.91,886.39 C3.1@1482.3,885 1482.3,840.09 1501,821.39 Q5.1@1501,778
NetC5_1: C5.1 D5.3 R111.1 R118.2 | length 505.1
  Top w8: R111.1@2279,3165.91 2237.5,3165.91 2223,3151.41 D5.3@2223,3071 2281,3071 2285.51,3075.51 C5.1@2345,3075.51 ; C5.1@2354.6,3075 2354.6,2946.56 2369.79,2931.36 R118.2@2369.79,2842.52
NetC7_1: C7.1 D6.3 R112.1 R119.2 | length 1428.3
  Top w8: R119.2@2394.09,3315 2453.5,3315 2523.5,3245 2539.3,3245 2565.5,3218.8 2637.56,3218.8 2642.25,3214.11 2642.25,3167.26 ; v1(2521.5,2655.82) 2615,2749.32 D6.3@2615,2948 2615,3040 2642.25,3067.25 2642.25,3165 ; v1@2577.81,2496.81 2830.73,2496.81 2865,2496.81 2865.81,2496 2893.71,2496 2905,2507.29 2905,2509.3 2912.21,2516.51 C7.1@2914.22,2516.51
  Bottom w8: v1(2521.5,2655.82) 2521.5,2552.07 v1(2579.57,2494)
NetC14_1: C14.1 D7.3 R114.1 R120.2 | length 402.1
  Top w8: D7.3@2750,1071.77 2750,1120.8 2785.11,1155.91 R120.2@2859.1,1155.91 2906,1109 2946.91,1109 R114.1@2950.91,1105 2950.91,1216.31 C14.1@2954.6,1220
NetC20_1: C20.1 R82.2 U2.25 U18.1 U18.2 | length 491.4
  Top w8: U2.25@1165.2,1940.63 1195.63,1940.63 1230,1975 1279.3,1975 C20.1@1282,1977.7 U18.1@1282,2077 ; R82.2@1315,2247.28 1282,2214.28 U18.1@1282,2077 ; U18.2@1358,2077 U18.1@1282,2077
NetC22_1: C22.1 R90.1 R93.1 U2.15 | length 2908.7
  Top w8: v1(3035,4463) 3048,4450 C22.1@3078.5,4450 3078.5,4508.5 3100,4530 3165.5,4530 3186.31,4509.19 R93.1@3186.31,4490 3222,4490 3225,4493 R90.1@3261.26,4493
  Bottom w8: U2.15@1765.2,2440.63 1938,2613.43 1938,3421 2980,4463 v1(3035,4463)
NetC23_1: C23.1 R102.1 R106.1 U2.41 | length 4440.1
  Top w8: U2.41@1765.2,2040.63 1734.37,2040.63 1660,2115 1660,2266.26 1680,2286.26 1869.76,2286.26 2176.05,2592.55 2420.31,2592.55 2425,2597.23 2425,2930.63 2435,2940.63 ; C23.1@1780,4719.6 1745.69,4719.6 1742,4715.91 R106.1@1708,4715.91 R102.1@1640,4715.91 1627,4715.91 1626,4714.91 1626,4652.01 1837.51,4440.5 2341.53,4440.5 2351.91,4450.88 2617.94,4450.88 2633,4435.81 2633,3583 2545,3495 v1(2545,3335) ; 2440,2940.63 2440,2945.6 v1@2545,3050.6
  Bottom w8: v1(2541.41,3048) 2543.2,3049.8 2543.2,3333.2 v1(2545,3335)
NetC24_1: C24.1 R103.1 R107.1 U2.23 | length 2355.7
  Top w8: v1(1596,4543.19) 1639.19,4500 1685,4500 1774.62,4410.38 1774.62,3984.62 1420,3630 1420,3471.06 1424.69,3466.38 1539.45,3466.38 U2.23@1765.2,3240.63 ; v1(1866,4643.54) 1900,4677.54 R103.1@1900,4715.91 1919.09,4715.91 1945,4690 1972.7,4690 C24.1@2000,4717.3 2001.39,4715.91 R107.1@2070,4715.91
  Bottom w8: v1(1596,4543.19) 1697.81,4645 v1@1870,4645
NetC30_1: C30.1 Q13.1 R70.2 R124.1 | length 230.6
  Top w8: Q13.1@2438,669.93 2440,671.93 2440,764.09 R124.1@2439.09,765 2439.09,829.09 C30.1@2440,830 2440,897.71 R70.2@2439.09,898.61
NetC31_1: C31.1 Q14.1 R121.2 R125.1 | length 256.4
  Top w8: R121.2@948.91,1027 948.91,957.61 949.51,957 949.51,882.79 C31.1@950.3,882 949.51,881.21 949.51,844.79 958,836.3 Q14.1@958,775
NetD1_3: D1.3 U1.1 | length 2472.5
  Top w8: U1.1@652.25,691 v1(699,691) ; D1.3@1398,2710 v1@1480,2710
  Bottom w8: v1(699,691) 1315,1307 1315,2066.38 1482.9,2234.29 v1(1482.9,2710)
NetD9_1: D9.1 Q8.3 R101.2 R102.2 | length 771.4
  Top w25: Q8.3@1227.24,4735 1227.24,4792 1241.81,4806.57 1241.81,4843.19 ; R101.2@1241.81,4865 1241.81,4843.19 ; R102.2@1640,4754.09 1640,4771.5 ; D9.1@1775.5,4832 D9.1@1775.5,4835 ; D9.1@1775.5,4833 1701.5,4833 1640,4771.5 ; 1241.81,4843.19 1254,4831 1625,4831 1640,4816 1640,4771.5
NetD9_2: D9.2 J11.1 R97.1 R98.1 R103.2 | length 1403.9
  Top w25: D9.2@1904.5,4835 1904.5,4796.5 1900,4792 R103.2@1900,4754.09 1918.91,4754.09 v1(1939,4734) ; 2710,4681 2745,4646 2745,4538.13 2792.13,4491 R97.1@2792.13,4376.02 R98.1@2792.13,4205
  Bottom w25: v1(1939,4734) 1940.91,4735.91 2132.42,4735.91 2144.52,4748 2607,4748 2622.5,4732.5 2622.5,4717.5 J11.1@2660,4680
NetD10_1: D10.1 J12.2 | length 898.9
  Top w30: J12.2@482.21,4740 482.21,4657.25 585.2,4554.25 1253.25,4554.25 D10.1@1255,4556
NetDS5_1: DS5.1 DS6.2 J8.2 R61.2 | length 1640.6
  Top w8: R61.2@3340,465.91 3340,335 3425,250 3600,250 3740,390 3740,839.64 3862.48,962.12 DS6.2@3862.48,1067.95 3862.48,1127.95 3867.48,1132.95 3885.67,1132.95 ; J8.2@3825,1325 3860,1290 3860,1147.48 DS5.1@3867.48,1140
NetDS5_2: DS5.2 DS6.1 J8.1 R60.2 | length 1545.7
  Top w8: R60.2@3475,465 3475,335 3485,325 3595,325 3675,405 3675,930.31 3679.69,935 3702.05,935 3797.52,1030.47 DS6.1@3797.52,1064.61 ; DS6.1@3802.52,1072.95 DS5.2@3802.52,1132.95 ; DS5.2@3802.52,1140 3770,1140 3750,1160 3750,1415 3760,1425 J8.1@3825,1425
NetDS8_1: DS8.1 R89.1 | length 100.9
  Top w8: R89.1@2935.91,4485 2935.91,4455.55 DS8.1@2986.46,4405
NetDS9_1: DS9.1 R101.1 | length 67.5
  Top w8: R101.1@1280,4865 DS9.1@1347.52,4865
NetDS11_1: DS11.1 R110.2 | length 242.9
  Top w8: DS11.1@1206.61,4240 1326.61,4120 R110.2@1399.81,4120
NetDS12_2: DS12.2 R113.1 | length 91.8
  Top w8: R113.1@325,4478.19 DS12.2@325,4570
NetF1_2: F1.2 Q4.2 R88.1 | length 279.3
  Top w25: Q4.2@3475.28,4327.76 3443.19,4295.66 R88.1@3443.19,4235 3470,4235 3497.5,4207.5 F1.2@3497.5,4100
NetF2_2: F2.2 Q8.2 R100.1 | length 170.8
  Top w25: F2.2@972.5,4723.07 1011,4723.07 1021.03,4713.03 R100.1@1060,4713.03 1088,4713.03 1103.43,4697.6 Q8.2@1132.76,4697.6
NetF3_1: F3.1 U2.3.3V_2 | length 115.8
  Top w8: 1821,3340.63 1823.32,3342.95
  Top w16: U2.3.3V_2@1765.2,3340.63 1821,3340.63 ; 1823.32,3342.95 F3.1@1880,3342.95
NetJ1_1: J1.1 Q5.3 | length 521.3
  Top w16: Q5.3@1463,692 1463,610.93 1505.7,568.23 1505.7,250.7 1505,250 1505,193.23 J1.1@1501.77,190
NetJ1_3: J1.3 Q2.3 | length 519.1
  Top w16: Q2.3@1185,692 1185,645 1226.18,603.82 J1.3@1226.18,190
NetJ1_5: J1.5 Q14.3 | length 511.7
  Top w16: Q14.3@920,689 920,249.5 945.02,224.48 945.02,195.57 J1.5@950.59,190
NetJ1_7: J1.7 R1.1 R5.1 U1.7 | length 1060.1
  Top w8: R5.1@305,640 R1.1@305,701 ; U1.7@437.75,741 391,741 353.3,703.3 342.3,703.3 ; J1.7@675,190 600,115 530,115 342.3,302.7 342.3,703.3 ; R1.1@305,701 340,701 342.3,703.3 ; R1.1@305,701 302.74,701 305,703.26 R1.1@305,701
NetJ1_8: J1.8 R1.2 R4.1 U1.6 | length 831.6
  Top w8: R1.2@302.74,739.19 319.58,739.19 v1(353,772.61) 371.39,791 U1.6@437.75,791 494,791 519.09,765.91 R4.1@519.09,612.21 519.09,410.91 537.2,392.8 J1.8@537.2,190
NetJ5_3: J5.3 U2.18 U3.4 | length 6893.4
  Top w8: v1(3058,3770) 3070.31,3782.31 U3.4@3070.31,3800
  Bottom w8: U2.18@1765.2,2740.63 1801,2776.43 1801,4268 2030,4497 3068,4497 3312,4253 ; v1(3058,3770) 3005,3717 3005,3501 3050,3456 3410,3456 3464,3510 3750,3510 3768,3528 3768,3683.5 3755.5,3696 3582.75,3696 3570.25,3708.5 3570.25,3769.66 3387.91,3952 3348,3952 3106,4194 3106,4252 3107,4253 3312,4253 ; J5.3@3628,3756 3564,3820 ; 3312,4253 3333,4253 3564,4022 3564,4004.45 3564,3823.45 3564,3820 ; 3312,4253 3560.55,4004.45 3560.55,3823.45 3564,3820
NetJ5_5: J5.5 R22.2 | length 147.1
  Top w8: R22.2@3487.09,3671 3500.12,3671 3515.12,3656 J5.5@3628,3656
NetJ5_6: J5.6 U2.19 U3.5 | length 3667.1
  Top w8: U2.19@1765.2,2840.63 1972.13,2840.63 v1(1985,2853.5) ; U3.5@3090,3800 3090,3822 3091,3823 3245,3823 3318,3896 3755.5,3896 3768,3883.5 3768,3696 J5.6@3728,3656
  Bottom w8: v1(1985,2853.5) 1986,2854.5 1986,2999 2923,3936 3340,3936 3486,3790 3486,3727 3597,3616 3688,3616 J5.6@3728,3656
NetJ5_7: J5.7 R23.2 | length 159.5
  Top w8: R23.2@3487.09,3511 3583,3511 J5.7@3628,3556
NetJ5_8: J5.8 R24.1 | length 275.1
  Top w8: R24.1@3487.09,3559.79 3575.92,3559.79 3615.33,3599.19 3684.81,3599.19 J5.8@3728,3556
NetJ5_9: J5.9 J5.11 | length 100
  Top w8: J5.11@3628,3356 J5.9@3628,3456
NetJ5_10: J5.10 J5.12 | length 100
  Top w8: J5.12@3728,3356 J5.10@3728,3456
NetJ5_13: J5.13 R25.2 | length 182.2
  Top w8: R25.2@3488,3357.95 3526.05,3357.95 J5.13@3628,3256
NetJ5_14: J5.14 R26.1 | length 326.1
  Top w8: R26.1@3487.09,3306 3544,3306 3565,3285 3565,3240 3595,3210 3682,3210 J5.14@3728,3256
NetJ5_15: J5.15 R27.2 R69.2 | length 1857.3
  Top w8: R27.2@3487.09,3206 3578,3206 J5.15@3628,3156 ; R69.2@3605.23,1815 3735,1815 3798.28,1878.28 v1(3798.28,2316.1)
  Bottom w8: J5.15@3628,3156 3675,3109 3675,3029.64 3699.64,3005 3845.31,3005 3850,3000.31 3850,2367.82 v1(3798.28,2316.1)
NetJ5_16: J5.16 R12.1 R28.1 | length 1585.5
  Top w8: R28.1@3487.09,3156 3548.5,3156 3589.5,3115 3727,3115 3728,3116 J5.16@3728,3156 ; R12.1@3603.19,2055 3606,2057.82 v1(3670,2057.82) 3751.5,2139.32 3751.5,2623.64 3767.5,2639.64 3767.5,2961.57 3800,2994.07 3800,3115 3795,3120 v1@3795,3155
  Bottom w8: J5.16@3728,3156 3729,3155 3792.19,3155 v1(3793.28,3156.1)
NetJ5_17: J5.17 R29.2 R68.2 | length 1442.8
  Top w8: R29.2@3487.09,3106 3578,3106 J5.17@3628,3056 ; R68.2@3605.5,1935 3662.81,1935 v1(3665,1932.82)
  Bottom w8: J5.17@3628,3056 3591.55,3056 3560.55,3025 3560.55,2549.72 3630,2480.28 3630,2005 3665,1970 v1@3665,1927.82
NetJ5_18: J5.18 R11.1 R30.1 | length 1779
  Top w8: R30.1@3487.09,3056 3572.14,3056 3611.64,3016.5 3727,3016.5 3728,3017.5 J5.18@3728,3056 ; R11.1@3604.09,1995 3688.49,1995 3695.67,1987.82 v1(3700,1987.82)
  Bottom w8: v1@3690,1990 3695,1985 3855,1985 3875,2005 3875,3040 3859,3056 J5.18@3728,3056
NetJ5_19: J5.19 R13.2 R31.2 | length 1564
  Top w8: R31.2@3487.09,3005.88 3539.12,3005.88 3589,2956 J5.19@3628,2956 ; R13.2@3604.19,1875 3720,1875 3765,1920 3765,2570 3803.28,2608.28 v1(3803.28,2926.1)
  Bottom w8: J5.19@3628,2956 3674,2910 3787.19,2910 v1(3803.28,2926.1)
NetJ5_20: J5.20 R32.1 R40.2 | length 324.7
  Top w8: R40.2@3487.09,2904.98 R32.1@3487.09,2956 3534,2956 3573.5,2916.5 3688.5,2916.5 J5.20@3728,2956
NetJ5_22: J5.22 R33.1 R44.2 | length 345.8
  Top w8: R33.1@3487.09,2806 R44.2@3487.09,2856 3566,2856 3605.5,2895.5 3727,2895.5 J5.22@3728,2856
NetJ5_23: J5.23 R34.2 R43.1 | length 336
  Top w8: R43.1@3316.19,2805 3376.69,2805 3399.69,2782 3467.7,2782 3487.09,2762.61 R34.2@3487.09,2756 J5.23@3628,2756
NetJ5_24: J5.24 R35.1 R46.2 | length 311.6
  Top w8: R46.2@3487.09,2656 R35.1@3487.09,2706 3578.5,2706 3587.5,2715 3687,2715 J5.24@3728,2756
NetJ5_25: J5.25 R36.2 R42.1 | length 242.7
  Top w8: R42.1@3488,2496 3488,2555.09 R36.2@3487.09,2556 3528,2556 J5.25@3628,2656
NetJ5_26: J5.26 R37.1 R48.2 | length 481.5
  Top w8: R48.2@3319.02,2586 3411.35,2586 3412.66,2584.69 3482.41,2584.69 3487.09,2589.38 R37.1@3487.09,2606 3522.14,2606 3611.64,2695.5 3688.5,2695.5 J5.26@3728,2656
NetJ6_1: J6.1 R72.2 | length 2362.7
  Top w8: R72.2@1615,755.91 1615,454.54 1989.54,80 3365.59,80 J6.1@3475.59,190
NetJ6_2: J6.2 R67.2 | length 1167.5
  Top w8: R67.2@2515,465 2510,460 2510,360 2580,290 2580,145 2620,105 3253.21,105 J6.2@3337.8,189.59 ; J6.2@3335,192.38 J6.2@3337.8,189.59 ; J6.2@3340,191.79 J6.2@3337.8,189.59
NetJ6_3: J6.3 R62.2 | length 276.3
  Top w8: J6.3@3200,189.59 R62.2@3200,465.91
NetJ6_4: J6.4 R63.2 | length 277.5
  Top w8: J6.4@3062.2,189.59 3062.2,463.11 R63.2@3065,465.91
NetJ6_5: J6.5 R64.2 | length 276.6
  Top w8: J6.5@2924.41,189.59 2924.41,465.32 R64.2@2925,465.91
NetJ6_6: J6.6 R65.2 | length 277.7
  Top w8: J6.6@2786.61,189.59 2786.61,462.52 R65.2@2790,465.91
NetJ6_7: J6.7 R66.2 | length 276.3
  Top w8: J6.7@2648.82,189.59 R66.2@2648.82,465.91
NetJ6_8: J6.8 Q13.3 | length 515.1
  Top w8: Q13.3@2400,583.93 2370,553.93 2370,255 2435.41,189.59 2511.02,189.59 J6.8@2515,193.56
NetJ9_2: J9.2 Q3.3 | length 283.4
  Top w8: J9.2@2050,275 2050,369.27 2030,389.27 2030,437 Q3.3@2110,517
NetJ10_1: J10.1 Q4.3 R89.2 R90.2 | length 895.7
  Top w25: R89.2@2974.09,4485 v1(2974.09,4577) ; v1(3299.45,4544.55) R90.2@3299.45,4493 3299.45,4476.05 3353.26,4422.24 Q4.3@3437.88,4422.24 3437.88,4535 3445,4542.12 J10.1@3445,4655
  Bottom w25: v1(2974.09,4577) 3267,4577 v1(3299.45,4544.55)
NetQ1_1: Q1.1 R7.2 R116.1 | length 195.9
  Top w8: R116.1@905.91,2946.77 R7.2@970,2946.77 970,2885 976,2879 Q1.1@976,2817.42
NetQ3_1: Q3.1 R85.2 | length 86.4